# Altium PCB Pedal_Power.PcbDoc
Units mm, origin at the board's own origin, x right, y up, seen from the top; angles counter-clockwise.
Board outline 20 x 54 mm, 2 copper layers (Top Layer, Bottom Layer); 45 components, 30 nets, 115 pads, 44 vias.
Unrouted connection lines stored in the file: 19.
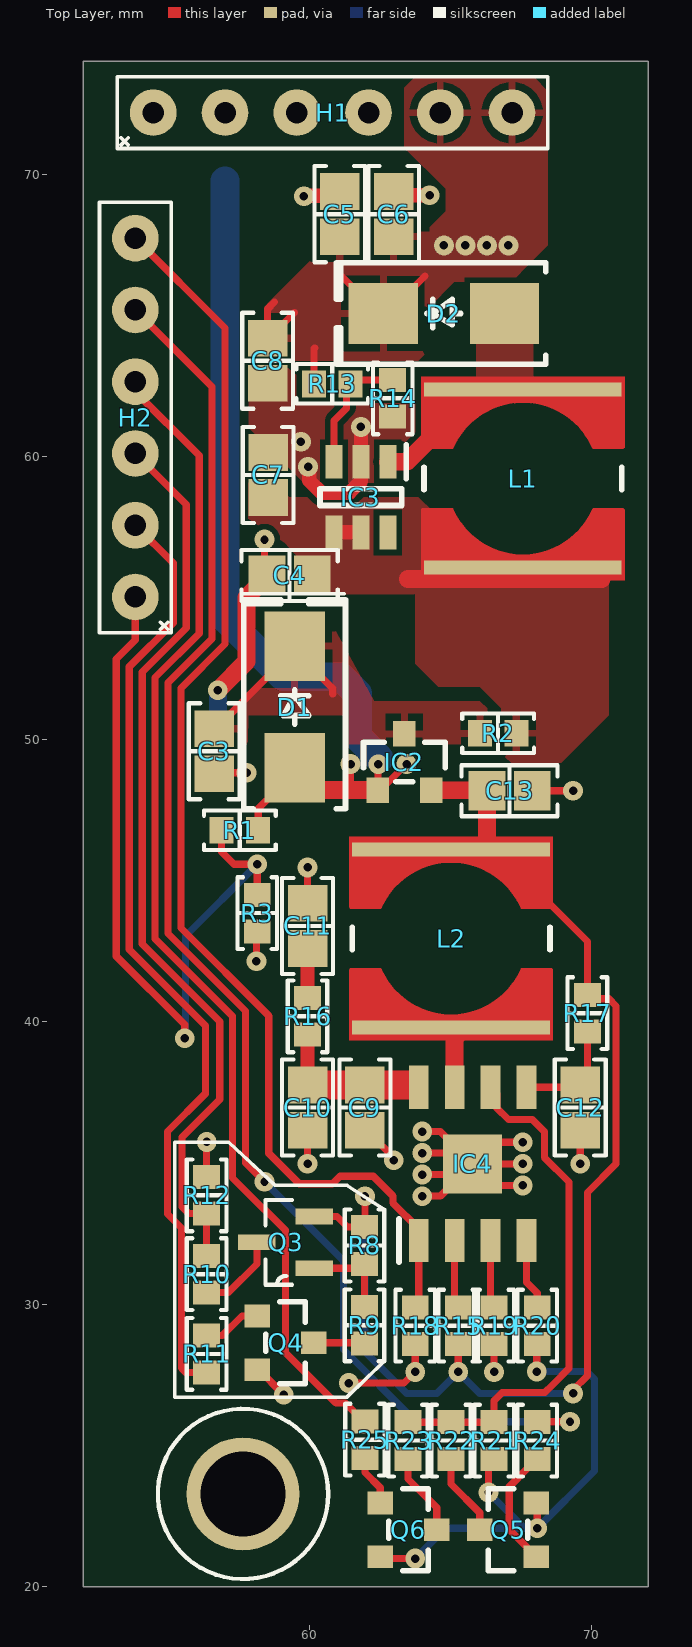
[diagram p0: Top Layer view]
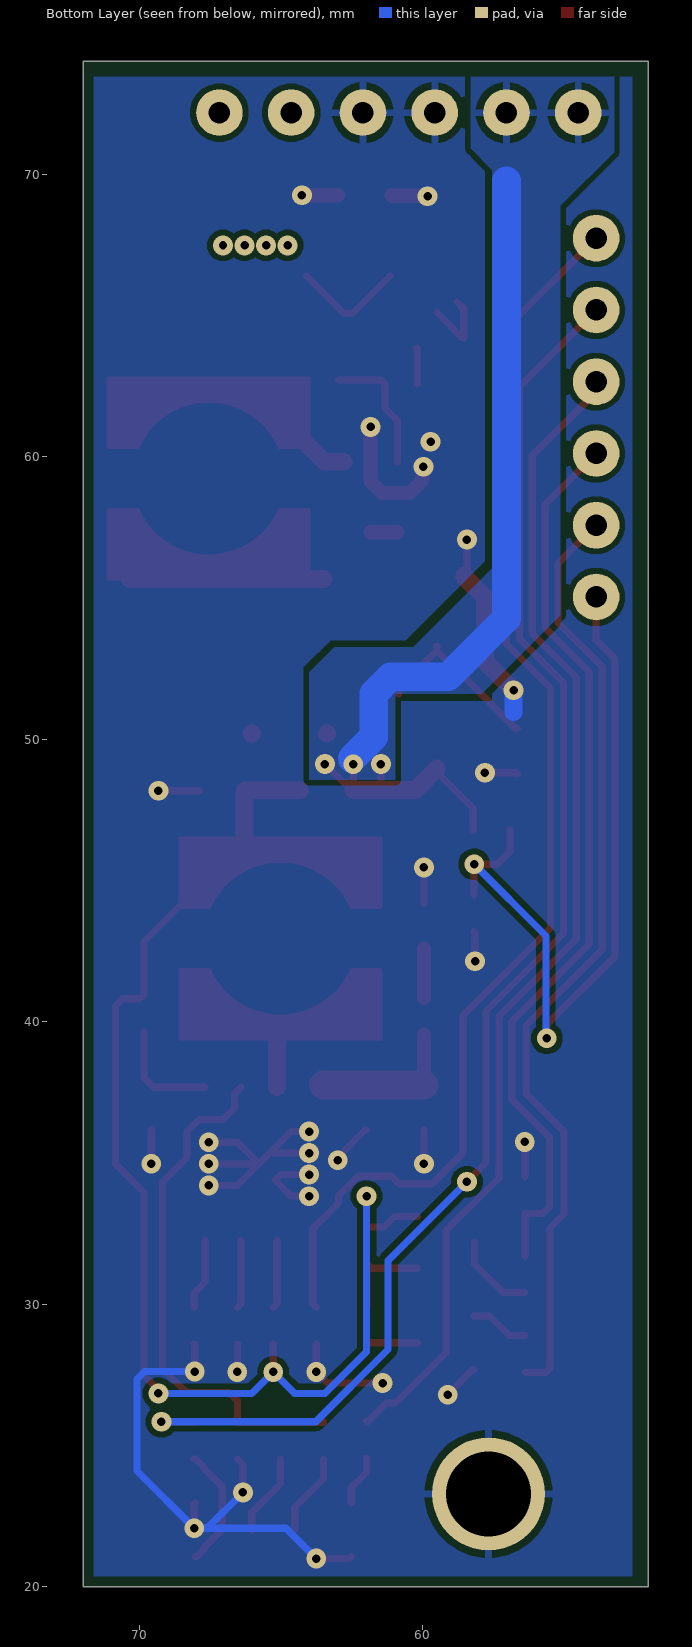
[diagram p1: Bottom Layer view, seen from below]
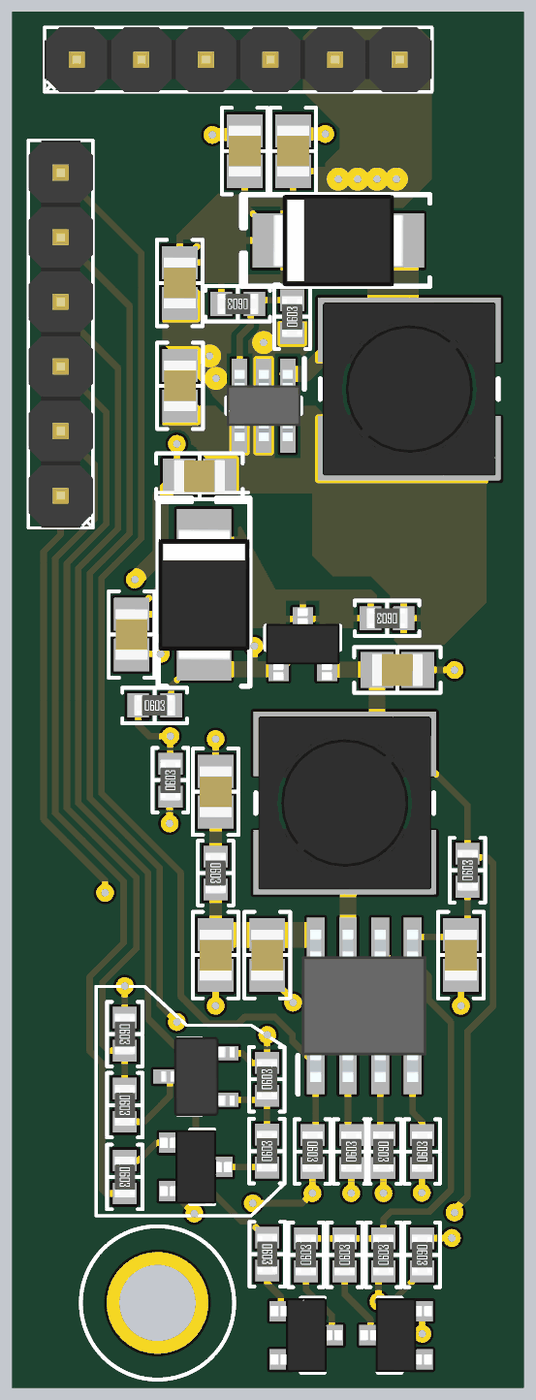
[diagram p2: 3D render of the assembled board from above, using the file's embedded part models]

## Layer stack, top to bottom
Top Solder: solder mask 0.0102, Solder Resist, Dk 3.5
Top Layer: signal copper 0.0356
Dielectric 1: dielectric 0.32, FR-4, Dk 4.8
Bottom Layer: signal copper 0.0356
Bottom Solder: solder mask 0.0102, Solder Resist, Dk 3.5

## Board outline
52,20 72,20 72,74 52,74

## Design rules (kind name [scope] priority, off if disabled: settings)
BoardOutlineClearance [All] p1: gap=0.254 ignorepadtopadclearanceinfootprint=FALSE except(0: Arc-SplitContinuation Track-SplitContinuation SMDPad-SplitContinuation THPad-SplitContinuation Via-SplitContinuation Fill-SplitContinuation Poly-SplitContinuation Region-SplitContinuation Text-SplitContinuation)
Clearance [All] p1: gap=0.203 ignorepadtopadclearanceinfootprint=FALSE
PolygonConnect PolygonConnect_6 [All vs IsNamedPolygon('NONET_L01_P-001')] p1: thpad.connectstyle=Relief thpad.reliefconductorwidth=0.254 thpad.reliefentries=4 thpad.polygonreliefangle="90 Angle" thpad.airgapwidth=0.254 smdpad.connectstyle=Relief smdpad.reliefconductorwidth=0.254 smdpad.reliefentries=4 smdpad.polygonreliefangle="90 Angle" smdpad.airgapwidth=0.254 via.connectstyle=Direct via.reliefconductorwidth=0.254 via.reliefentries=4 via.polygonreliefangle="90 Angle" via.airgapwidth=0.254
PolygonConnect PolygonConnect_5 [All vs IsNamedPolygon('NONET_L01_P-001')] p2: thpad.connectstyle=Relief thpad.reliefconductorwidth=0.254 thpad.reliefentries=4 thpad.polygonreliefangle="90 Angle" thpad.airgapwidth=0.254 smdpad.connectstyle=Relief smdpad.reliefconductorwidth=0.254 smdpad.reliefentries=4 smdpad.polygonreliefangle="90 Angle" smdpad.airgapwidth=0.254 via.connectstyle=Direct via.reliefconductorwidth=0.254 via.reliefentries=4 via.polygonreliefangle="90 Angle" via.airgapwidth=0.254
PolygonConnect PolygonConnect_4 [All vs IsNamedPolygon('NONET_L01_P-001')] p3: thpad.connectstyle=Relief thpad.reliefconductorwidth=0.254 thpad.reliefentries=4 thpad.polygonreliefangle="90 Angle" thpad.airgapwidth=0.254 smdpad.connectstyle=Relief smdpad.reliefconductorwidth=0.254 smdpad.reliefentries=4 smdpad.polygonreliefangle="90 Angle" smdpad.airgapwidth=0.254 via.connectstyle=Direct via.reliefconductorwidth=0.254 via.reliefentries=4 via.polygonreliefangle="90 Angle" via.airgapwidth=0.254
PolygonConnect PolygonConnect_3 [All vs IsNamedPolygon('+5V_L01_P002')] p4: thpad.connectstyle=Relief thpad.reliefconductorwidth=0.254 thpad.reliefentries=4 thpad.polygonreliefangle="90 Angle" thpad.airgapwidth=0.254 smdpad.connectstyle=Relief smdpad.reliefconductorwidth=0.254 smdpad.reliefentries=4 smdpad.polygonreliefangle="90 Angle" smdpad.airgapwidth=0.254 via.connectstyle=Direct via.reliefconductorwidth=0.254 via.reliefentries=4 via.polygonreliefangle="90 Angle" via.airgapwidth=0.254
PolygonConnect PolygonConnect_2 [All vs IsNamedPolygon('NONET_L01_P-001')] p5: thpad.connectstyle=Relief thpad.reliefconductorwidth=0.254 thpad.reliefentries=4 thpad.polygonreliefangle="90 Angle" thpad.airgapwidth=0.254 smdpad.connectstyle=Relief smdpad.reliefconductorwidth=0.254 smdpad.reliefentries=4 smdpad.polygonreliefangle="90 Angle" smdpad.airgapwidth=0.254 via.connectstyle=Direct via.reliefconductorwidth=0.254 via.reliefentries=4 via.polygonreliefangle="90 Angle" via.airgapwidth=0.254
PolygonConnect PolygonConnect_1 [All vs IsNamedPolygon('+5V_L01_P002') Or IsNamedPolygon('+V_SYS_L01_P001') Or IsNamedPolygon('GND_L01_P006') Or IsNamedPolygon('NETD2_1_L01_P003')] p6: thpad.connectstyle=Relief thpad.reliefconductorwidth=0.254 thpad.reliefentries=4 thpad.polygonreliefangle="90 Angle" thpad.airgapwidth=0.254 smdpad.connectstyle=Direct smdpad.reliefconductorwidth=0.254 smdpad.reliefentries=4 smdpad.polygonreliefangle="90 Angle" smdpad.airgapwidth=0.254 via.connectstyle=Direct via.reliefconductorwidth=0.254 via.reliefentries=4 via.polygonreliefangle="90 Angle" via.airgapwidth=0.254
PolygonConnect [All] p7: connectstyle=Relief reliefconductorwidth=0.254 reliefentries=4 polygonreliefangle="90 Angle" airgapwidth=0.254
RoutingVias [All] p1: holewidth=0.3 width=0.7 viastyle="Through Hole" minholewidth=0.3 minwidth=0.7 maxholewidth=0.3 maxwidth=0.7
SolderMaskExpansion [All] p1: expansion=0.102 istentingtop=FALSE
Width [All] p1: maxlimit=1.016 minlimit=0.203 preferedwidth=0.254
30 further rules are at their usual default settings.

## Components (designator, comment, footprint, x,y, rotation, side; value= is the part's Value field where it differs from the comment)
C3 "10 µF" "CAP 0805_2012" 56.638,49.575 r90 top
C4 "1 µF" "CAP 0805_2012" 59.305,55.798 r0 top
C5 "1 µF" "CAP 0805_2012" 61.083,68.587 r270 top
C6 "1 µF" "CAP 0805_2012" 62.988,68.587 r270 top
C7 "22 µF" "CAP 0805_2012" 58.543,59.354 r270 top
C8 "22 µF" "CAP 0805_2012" 58.528,63.398 r90 top
C9 "10 µF" "CAP 0805_2012" 61.972,36.964 r90 top
C10 "22 µF" "CAP 0805_2012" 59.94,36.964 r90 top
C11 "10 µF" "CAP 0805_2012" 59.94,43.39 r270 top
C12 "22 µF" "CAP 0805_2012" 69.592,36.964 r90 top
C13 "22 µF" "CAP 0805_2012" 67.09,48.178 r180 top
D1 "SS24" "DO214AA SMB" 59.486,51.141 r90 top
D2 "SS24" "DO214AA SMB" 64.766,65.069 r180 top
H1 "arduino_header_6" header-6_male 54.479,72.181 r0 top
H2 "arduino_header_6" header-6_male 53.844,55.036 r90 top
IC2 "DMP1045U-7" "DIODES SOT-23-3" 63.369,49.194 r90 top
IC3 "MT3608" SOT95P280X145-6N 61.83,58.572 r270 top
IC4 "IP2312" SOIC127P600X165-9N 65.782,34.97 r90 top
L1 "3.3 µH" "BOURNS SRR6028" 67.56,59.227 r90 top
L2 "3.3 µH" "BOURNS SRR6028" 65.02,42.946 r90 top
Q3 "3906" SOT-23 59.162,32.192 r180 top
Q4 "MMBT3904-7-F" "DIODES SOT-23-3" 59.162,28.636 r0 top
Q5 "MMBT3904-7-F" "DIODES SOT-23-3" 67.036,22.016 r180 top
Q6 "MMBT3904-7-F" "DIODES SOT-23-3" 63.512,22.016 r0 top
R1 "10 kOhms" "RES 0603_1608" 57.542,46.781 r0 top
R2 "=Value" "RES 0603_1608" 66.686,50.21 r180 top
R3 "10 kOhms" "RES 0603_1608" 58.162,43.845 r90 top
R8 "10 kOhms" "RES 0603_1608" 61.956,32.08 r90 top
R9 "10 kOhms" "RES 0603_1608" 61.956,29.256 r90 top
R10 "7.5 kOhms" "RES 0603_1608" 56.368,31.064 r270 top
R11 "10 kOhms" "RES 0603_1608" 56.368,28.24 r270 top
R12 "2.7 kOhms" "RES 0603_1608" 56.368,33.858 r270 top
R13 "10 kOhms" "RES 0603_1608" 60.814,62.58 r180 top
R14 "1 kOhms" "RES 0603_1608" 62.953,62.07 r90 top
R15 "1 kOhms" "RES 0603_1608" 65.274,29.24 r90 top
R16 "2 Ohms" "RES 0603_1608" 59.94,40.192 r270 top
R17 "500 mOhms" "RES 0603_1608" 69.846,40.304 r90 top
R18 "1 kOhms" "RES 0603_1608" 63.75,29.24 r270 top
R19 "1 kOhms" "RES 0603_1608" 66.544,29.24 r270 top
R20 "51 kOhms" "RES 0603_1608" 68.068,29.24 r90 top
R21 "330 kOhms" "RES 0603_1608" 66.544,25.176 r90 top
R22 "220 kOhms" "RES 0603_1608" 65.02,25.176 r90 top
R23 "51 kOhms" "RES 0603_1608" 63.496,25.176 r90 top
R24 "10 kOhms" "RES 0603_1608" 68.068,25.176 r270 top
R25 "10 kOhms" "RES 0603_1608" 61.972,25.206 r270 top

## Footprints (in the part's own frame and the unit in brackets; to place one, negate y for a bottom-side part, rotate by r counter-clockwise, add the part's x,y. Pads: shape width x height; smd on the part's side, far side on the other; paste and mask are expansions set on the pad)
"BOURNS SRR6028" [mm] "Precision Wire Wound Inductor, 2-Leads, Body 6.80x6.80mm, IPC Medium Density"
  rect 0.5x7 smd: 1(-3.15,0) 2(3.15,0)
  Top Layer region: -3.6,3.6 -1.1,3.6 -1.1,2.5 -1.4,2.4 -1.7,2.1 -1.9,2 -2.1,1.7 -2.3,1.4 -2.5,1 -2.6,0.7 -2.7,0.3 -2.7,0 -3.6,0
  Top Layer region: -3.6,-3.6 -1.1,-3.6 -1.1,-2.5 -1.4,-2.4 -1.7,-2.1 -1.9,-2 -2.1,-1.7 -2.3,-1.4 -2.5,-1 -2.6,-0.7 -2.7,-0.3 -2.7,0 -3.6,0
  Top Layer region: 3.6,-3.6 1.1,-3.6 1.1,-2.5 1.4,-2.4 1.7,-2.1 1.9,-2 2.1,-1.7 2.3,-1.4 2.5,-1 2.6,-0.7 2.7,-0.3 2.7,0 3.6,0
  Top Layer region: 3.6,3.6 1.1,3.6 1.1,2.5 1.4,2.4 1.7,2.1 1.9,2 2.1,1.7 2.3,1.4 2.5,1 2.6,0.7 2.7,0.3 2.7,0 3.6,0
  Top Layer lines w0.1: -1.1,3.55 -1.1,2.5 ccw(c0,0) -2.731,0 ccw(c0,0) -1.1,-2.5 -1.1,-3.55 ; 1.1,3.55 1.1,2.5 cw(c0,0) 2.731,0 cw(c0,0) 1.1,-2.5 1.1,-3.55
  silkscreen extent -0.4,-3.5 0.4,3.5, body extent -3.4,-3.4 3.4,3.4, height 2.8
"CAP 0805_2012" [mm] "Chip Capacitor, 2-Leads, Body 2.00x1.20mm, IPC Medium Density"
  rect 1.3x1.4 smd: 1(-0.8,0) 2(0.8,0)
  silkscreen extent -1.7,-0.9 1.7,0.9, body extent -1,-0.64 1,0.64, height 1.26
"DIODES SOT-23-3" [mm] "SOT23, 3-Leads, Body 2.90x2.40mm, Pitch 0.95mm, IPC Medium Density"
  rect 0.9x0.8 smd: 1(-1,0.95) 2(-1,-0.95) 3(1,0)
  silkscreen extent -0.7,-1.45 0.7,1.45, body extent -1.41,-1.45 1.41,1.45, height 1.5
"DO214AA SMB" [mm] "Molded Diode, 2-Leads, Body 4.31x3.62mm, IPC Medium Density"
  rect 2.45x2.15 smd: 1(-2.15,0) 2(2.15,0)
  silkscreen extent -3.6,-1.8 3.8,1.8, body extent -2.6,-1.8 2.6,1.8, height 2.4
header-6_male [mil]
  round 65 hole 30: 1(0,0) 2(100,0) 3(200,0) 4(300,0) 5(400,0) 6(500,0)
  silkscreen extent -50,-50 550,50, body extent -50,-50 550,50, height 339
"RES 0603_1608" [mm] "Chip Resistor, 2-Leads, Body 1.60x0.80mm, IPC Medium Density"
  rect 0.85x0.95 smd: 1(-0.65,0) 2(0.65,0)
  silkscreen extent -1.27,-0.7 1.27,0.7, body extent -0.8,-0.4 0.8,0.4, height 0.45
SOIC127P600X165-9N [mm]
  rect 1.525x0.7 smd: 1(-2.712,1.905) 2(-2.712,0.635) 3(-2.712,-0.635) 4(-2.712,-1.905) 5(2.712,-1.905) 6(2.712,-0.635) 7(2.712,0.635) 8(2.712,1.905)
  rect 2.09x2.09 smd: 9(0,0)
  silkscreen extent -3.47,2.61 -1.95,2.61, body extent -3,-2.45 3,2.45, height 1.65
SOT95P280X145-6N [mm]
  rect 1.2x0.6 smd: 1(-1.25,0.95) 2(-1.25,0) 3(-1.25,-0.95) 4(1.25,-0.95) 5(1.25,0) 6(1.25,0.95)
  silkscreen extent -1.85,-1.45 0.3,1.6, body extent -1.4,-1.45 1.4,1.45, height 1.45
SOT-23 [mil]
  rect 52x22 smd: 1(-40,36) 2(-40,-36) 3(40,0)
  silkscreen extent -9,-59 28,59, body extent -60,-61 58,61, height 57

## Part data
C3 C9 C11: library part C0805C106K8PAC7800, "CAP CER 10UF 10V X5R 0805", Device Package="0805 (2012 Metric)", Manufacturer=KEMET, Operating Temperature="-55°C ~ 85°C", Supplier Part Number 1=399-C0805C106K8PAC7800CT-ND, Temperature Coefficient=X5R, Tolerance=±10%, Voltage - Rated=10V, Applications="Bypass, Decoupling", Capacitance="10 µF", ComponentLink1Description=Datasheet, ComponentLink1URL=https://connect.kemet.com:7667/gateway/IntelliData-ComponentDocumentation/1.0/download/datasheet/C0805C106K8PACTU, ComponentLink2Description="DigiKey Link", ComponentLink2URL=https://www.digikey.com/en/products/detail/kemet/C0805C106K8PAC7800/1090830, LastUpdated="9/14/2022 7:51:56 AM", Lifecycle Status=Active, Minimum Order=1, Mounting Type="Surface Mount, MLCC", Package / Case="0805 (2012 Metric)", Packaging=TapeAndReel, Part Number=C0805C106K8PAC7800, Part Status=Active, PartId=44790, Price=0.02, Series="SMD Comm X5R", Size / Dimension="0.079\" L x 0.049\" W (2.00mm x 1.25mm)", Supplier 1=DigiKey, Thickness (Max)="0.055\" (1.40mm)"
C4 C5 C6: library part C0805C105K4RAC7800, "CAP CER 1UF 16V X7R 0805", Device Package="0805 (2012 Metric)", Manufacturer=KEMET, Operating Temperature="-55°C ~ 125°C", Supplier Part Number 1=399-C0805C105K4RAC7800CT-ND, Temperature Coefficient=X7R, Tolerance=±10%, Voltage - Rated=16V, Applications="Bypass, Decoupling", Capacitance="1 µF", ComponentLink1Description=Datasheet, ComponentLink1URL=https://api.kemet.com/component-edge/download/datasheet/C0805C105K4RACTU.pdf, ComponentLink2Description="DigiKey Link", ComponentLink2URL=https://www.digikey.com/en/products/detail/kemet/C0805C105K4RAC7800/416047, LastUpdated="9/19/2022 1:03:30 PM", Lifecycle Status=Active, Minimum Order=1, Mounting Type="Surface Mount, MLCC", Package / Case="0805 (2012 Metric)", Packaging=TapeAndReel, Part Number=C0805C105K4RAC7800, Part Status=Active, PartId=32075, Price=0.01, Series="SMD Comm X7R", Size / Dimension="0.079\" L x 0.049\" W (2.00mm x 1.25mm)", Supplier 1=DigiKey, Thickness (Max)="0.039\" (1.00mm)"
C7 C8 C10 C12 C13: library part GRM21BR61E226ME44K, "CAP CER 22UF 25V X5R 0805", Device Package="0805 (2012 Metric)", Manufacturer="Murata Electronics", Operating Temperature="-55°C ~ 85°C", Supplier Part Number 1=490-14661-1-ND, Temperature Coefficient=X5R, Tolerance=±20%, Voltage - Rated=25V, Applications="General Purpose", Capacitance="22 µF", ComponentLink1Description=Datasheet, ComponentLink1URL=https://search.murata.co.jp/Ceramy/image/img/A01X/G101/ENG/GRM21BR61E226ME44-01.pdf, ComponentLink2Description="DigiKey Link", ComponentLink2URL=https://www.digikey.com/en/products/detail/murata-electronics/GRM21BR61E226ME44K/4905534, LastUpdated="2/9/2024 8:15:53 PM", Lifecycle Status=Active, Minimum Order=1, Mounting Type="Surface Mount, MLCC", Package / Case="0805 (2012 Metric)", Packaging=TapeAndReel, Part Number=GRM21BR61E226ME44K, Part Status=Active, PartId=39870, Price=0.05, Series=GRM, Size / Dimension="0.079\" L x 0.049\" W (2.00mm x 1.25mm)", Supplier 1=DigiKey, Thickness (Max)="0.057\" (1.45mm)"
D1 D2: "DIODE SCHOTTKY 40V 2A DO214AA", Current - Average Rectified (Io)=2A, Current - Reverse Leakage @ Vr="400µA @ 40V", Manufacturer="ON Semiconductor", Operating Temperature - Junction="-65°C ~ 125°C", Package / Case="DO-214AA, SMB", Supplier Device Package="DO-214AA (SMB)", Supplier Part Number 1=SS24FSCT-ND, Voltage - DC Reverse (Vr) (Max)=40V, Voltage - Forward (Vf) (Max) @ If="500mV @ 2A", ComponentLink1Description=Datasheet, ComponentLink1URL=https://www.onsemi.com/pub/Collateral/SS29-D.pdf, ComponentLink2Description="DigiKey Link", ComponentLink2URL=http://digikey.com/product-detail/en/on-semiconductor/SS24/SS24FSCT-ND/1626273, Diode Type=Schottky, LastUpdated="2/8/2024 9:26:46 PM", Lifecycle Status=Active, Minimum Order=1, Mounting Type="Surface Mount", Packaging=TapeAndReel, Part Number=SS24, Part Status=Active, PartId=1394, Price=0.10, Series=-, Speed="Fast Recovery =< 500ns, > 200mA (Io)", Supplier 1=DigiKey
IC2: "MOSFET P-CH 12V 4A SOT23", Current - Continuous Drain (Id) @ 25°C="4A (Ta)", Drain to Source Voltage (Vdss)="12 V", Drive Voltage (Max Rds On,  Min Rds On)="1.8V, 4.5V", Input Capacitance (Ciss) (Max) @ Vds="1357 pF @ 10 V", Manufacturer="Diodes Incorporated", Operating Temperature="-55°C ~ 150°C (TJ)", Package / Case="TO-236-3, SC-59, SOT-23-3", Power Dissipation (Max)="800mW (Ta)", Supplier Device Package=SOT-23-3, Supplier Part Number 1=DMP1045U-7DICT-ND, ComponentLink1Description=Datasheet, ComponentLink1URL=https://www.diodes.com/assets/Datasheets/DMP1045U.pdf, ComponentLink2Description="DigiKey Link", ComponentLink2URL=https://www.digikey.com/en/products/detail/diodes-incorporated/DMP1045U-7/4249936, FET Type=P-Channel, Gate Charge (Qg) (Max) @ Vgs="15.8 nC @ 4.5 V", LastUpdated="2/8/2024 9:46:13 PM", Lifecycle Status=Active, Minimum Order=1, Mounting Type="Surface Mount", Packaging=TapeAndReel, Part Number=DMP1045U-7, Part Status=Active, Price=0.07, Rds On (Max) @ Id, Vgs="31mOhm @ 4A, 4.5V", Series=-, Supplier 1=DigiKey, Technology="MOSFET (Metal Oxide)", Vgs (Max)=±8V, Vgs(th) (Max) @ Id="1V @ 250µA"
IC3: "Integrated Circuit", Manufacturer_Name=Aerosemi, Datasheet Link=https://www.olimex.com/Products/Breadboarding/BB-PWR-3608/resources/MT3608.pdf, Height=1.45mm, Manufacturer_Part_Number=MT3608
IC4: "Integrated Circuit", Manufacturer_Name=INJOINIC, Datasheet Link=http://www.injoinic.com/wwwroot/uploads/files/20230913/623558e526750db62e25e32800f94a6b.pdf, Height=1.65mm, Manufacturer_Part_Number=IP2312
L1 L2: library part SRR6028-3R3Y, "FIXED IND 3.3UH 2.5A 28 MOHM SMD", Current - Saturation=2.6A, Current Rating (Amps)="2.5 A", DC Resistance (DCR)="28mOhm Max", Device Package=Nonstandard, Frequency - Self Resonant=45MHz, Inductance Frequency - Test="100 kHz", Manufacturer="Bourns Inc.", Operating Temperature="-40°C ~ 125°C", Q @ Freq="10 @ 7.96MHz", Supplier Part Number 1=118-SRR6028-3R3YCT-ND, Tolerance=±30%, ComponentLink1Description=Datasheet, ComponentLink1URL=https://www.bourns.com/docs/Product-Datasheets/SRR6028.pdf, ComponentLink2Description="DigiKey Link", ComponentLink2URL=https://www.digikey.com/en/products/detail/bourns-inc/SRR6028-3R3Y/1970369, Height - Seated (Max)="0.118\" (3.00mm)", Inductance="3.3 µH", LastUpdated="2/8/2024 9:34:55 PM", Lifecycle Status=Active, Material - Core=Ferrite, Minimum Order=1, Mounting Type="Surface Mount", Package / Case=Nonstandard, Packaging=TapeAndReel, Part Number=SRR6028-3R3Y, Part Status=Active, PartId=57, Price=0.31, Series=SRR6028, Shielding=Shielded, Size / Dimension="0.268\" L x 0.268\" W (6.80mm x 6.80mm)", Supplier 1=DigiKey, Type="Drum Core, Wirewound"
Q3: library part MMBT3906
Q4 Q5 Q6: "TRANS NPN 40V 0.2A SOT23-3", Current - Collector (Ic) (Max)="200 mA", Current - Collector Cutoff (Max)="50nA (ICBO)", DC Current Gain (hFE) (Min) @ Ic, Vce="100 @ 10mA, 1V", Frequency - Transition=300MHz, Manufacturer="Diodes Incorporated", Operating Temperature="-55°C ~ 150°C (TJ)", Package / Case="TO-236-3, SC-59, SOT-23-3", Power - Max="300 mW", Supplier Device Package=SOT-23-3, Supplier Part Number 1=MMBT3904-FDICT-ND, Voltage - Collector Emitter Breakdown (Max)="40 V", ComponentLink1Description=Datasheet, ComponentLink1URL=https://www.diodes.com/assets/Datasheets/ds30036.pdf, ComponentLink2Description="DigiKey Link", ComponentLink2URL=https://www.digikey.com/en/products/detail/diodes-incorporated/MMBT3904-7-F/814494, LastUpdated="2/8/2024 9:54:04 PM", Lifecycle Status=Active, Minimum Order=1, Mounting Type="Surface Mount", Packaging=TapeAndReel, Part Number=MMBT3904-7-F, Part Status=Active, PartId=85, Price=0.01, Series=-, Supplier 1=DigiKey, Transistor Type=NPN, Vce Saturation (Max) @ Ib, Ic="300mV @ 5mA, 50mA"
R1 R3 R8 R9 R11 R13 R24 R25: library part RT0603FRE0710KL, "RES SMD 10K OHM 1% 1/10W 0603", Device Package="0603 (1608 Metric)", Manufacturer=Yageo, Operating Temperature="-55°C ~ 155°C", Power (Watts)="0.1W, 1/10W", Supplier Device Package=0603, Supplier Part Number 1=YAG2321CT-ND, Temperature Coefficient=±50ppm/°C, Tolerance=±1%, ComponentLink1Description=Datasheet, ComponentLink1URL=https://www.yageo.com/upload/media/product/productsearch/datasheet/rchip/PYu-RT_1-to-0.01_RoHS_L_11.pdf, ComponentLink2Description="DigiKey Link", ComponentLink2URL=http://digikey.com/product-detail/en/yageo/RT0603FRE0710KL/YAG2321CT-ND/5252435, Composition="Thin Film", Height - Seated (Max)="0.022\" (0.55mm)", LastUpdated="9/2/2020 1:10:23 AM", Lifecycle Status=Active, Minimum Order=1, Number of Terminations=2, Package / Case="0603 (1608 Metric)", Packaging=TapeAndReel, Part Number=RT0603FRE0710KL, Part Status=Active, PartId=5671, Price=0.01, Resistance="10 kOhms", Series=RT, Size / Dimension="0.063\" L x 0.031\" W (1.60mm x 0.80mm)", Supplier 1=DigiKey
R2: library part RCA06030000ZSEA, "RES SMD 0 OHM JUMPER 1/10W 0603", Device Package="0603 (1608 Metric)", Manufacturer="Vishay Dale", Operating Temperature="-55°C ~ 155°C", Power (Watts)="0.1W, 1/10W", Ratings=AEC-Q200, Supplier Device Package=0603, Supplier Part Number 1=541-2192-1-ND, Tolerance=Jumper, ComponentLink1Description=Datasheet, ComponentLink1URL=http://www.vishay.com/docs/20037/rcae3.pdf, ComponentLink2Description="DigiKey Link", ComponentLink2URL=http://digikey.com/product-detail/en/vishay-dale/RCA06030000ZSEA/541-2192-1-ND/4946845, Composition="Thick Film", Features="Anti-Sulfur, Automotive AEC-Q200", Height - Seated (Max)="0.020\" (0.50mm)", LastUpdated="9/2/2020 1:10:23 AM", Lifecycle Status=Active, Minimum Order=1, Number of Terminations=2, Package / Case="0603 (1608 Metric)", Packaging=TapeAndReel, Part Number=RCA06030000ZSEA, Part Status=Active, PartId=5740, Price=0.01, Series=RCA, Size / Dimension="0.061\" L x 0.033\" W (1.55mm x 0.85mm)", Supplier 1=DigiKey
R10: library part RC0603FR-077K5L, "RES 7.5K OHM 1% 1/10W 0603", Device Package="0603 (1608 Metric)", Manufacturer=Yageo, Operating Temperature="-55°C ~ 155°C", Power (Watts)="0.1W, 1/10W", Supplier Device Package=0603, Supplier Part Number 1=311-7.50KHRCT-ND, Temperature Coefficient=±100ppm/°C, Tolerance=±1%, ComponentLink1Description=Datasheet, ComponentLink1URL=https://www.yageo.com/upload/media/product/productsearch/datasheet/rchip/PYu-RC_Group_51_RoHS_L_10.pdf, ComponentLink2Description="DigiKey Link", ComponentLink2URL=https://www.digikey.com/en/products/detail/yageo/RC0603FR-077K5L/727366, Composition="Thick Film", Features="Moisture Resistant", Height - Seated (Max)="0.022\" (0.55mm)", LastUpdated="2/9/2024 8:42:41 PM", Lifecycle Status=Active, Minimum Order=1, Number of Terminations=2, Package / Case="0603 (1608 Metric)", Packaging=CutTape, Part Number=RC0603FR-077K5L, Part Status=Active, PartId=19041, Price=0.01, Resistance="7.5 kOhms", Series=RC_L, Size / Dimension="0.063\" L x 0.031\" W (1.60mm x 0.80mm)", Supplier 1=DigiKey
R12: library part RC0603FR-072K7L, "RES 2.7K OHM 1% 1/10W 0603", Device Package="0603 (1608 Metric)", Manufacturer=Yageo, Operating Temperature="-55°C ~ 155°C", Power (Watts)="0.1W, 1/10W", Supplier Device Package=0603, Supplier Part Number 1=311-2.70KHRCT-ND, Temperature Coefficient=±100ppm/°C, Tolerance=±1%, ComponentLink1Description=Datasheet, ComponentLink1URL=https://www.yageo.com/upload/media/product/productsearch/datasheet/rchip/PYu-RC_Group_51_RoHS_L_10.pdf, ComponentLink2Description="DigiKey Link", ComponentLink2URL=https://www.digikey.com/en/products/detail/yageo/RC0603FR-072K7L/727032, Composition="Thick Film", Features="Moisture Resistant", Height - Seated (Max)="0.022\" (0.55mm)", LastUpdated="2/9/2024 8:42:41 PM", Lifecycle Status=Active, Minimum Order=1, Number of Terminations=2, Package / Case="0603 (1608 Metric)", Packaging=CutTape, Part Number=RC0603FR-072K7L, Part Status=Active, PartId=19013, Price=0.01, Resistance="2.7 kOhms", Series=RC_L, Size / Dimension="0.063\" L x 0.031\" W (1.60mm x 0.80mm)", Supplier 1=DigiKey
R14: library part RT0603FRE071KL, "RES SMD 1K OHM 1% 1/10W 0603", Device Package="0603 (1608 Metric)", Manufacturer=Yageo, Operating Temperature="-55°C ~ 155°C", Power (Watts)="0.1W, 1/10W", Supplier Device Package=0603, Supplier Part Number 1=YAG2323CT-ND, Temperature Coefficient=±50ppm/°C, Tolerance=±1%, ComponentLink1Description=Datasheet, ComponentLink1URL=https://www.yageo.com/upload/media/product/productsearch/datasheet/rchip/PYu-RT_1-to-0.01_RoHS_L_11.pdf, ComponentLink2Description="DigiKey Link", ComponentLink2URL=https://www.digikey.com/en/products/detail/yageo/RT0603FRE071KL/1075188, Composition="Thin Film", Height - Seated (Max)="0.022\" (0.55mm)", LastUpdated="9/19/2022 1:22:31 PM", Lifecycle Status=Active, Minimum Order=1, Number of Terminations=2, Package / Case="0603 (1608 Metric)", Packaging=TapeAndReel, Part Number=RT0603FRE071KL, Part Status=Active, PartId=5672, Price=0.01, Resistance="1 kOhms", Series=RT, Size / Dimension="0.063\" L x 0.031\" W (1.60mm x 0.80mm)", Supplier 1=DigiKey
R15 R18 R19: library part RC0603JR-071KP, "RES 1K OHM 5% 1/10W 0603", Device Package="0603 (1608 Metric)", Manufacturer=Yageo, Operating Temperature="-55°C ~ 155°C", Power (Watts)="0.1W, 1/10W", Ratings="7C1 RoHS w/out Exemption (100% Pb-Free)", Supplier Device Package=0603, Supplier Part Number 1=YAG1311CT-ND, Temperature Coefficient=±100ppm/°C, Tolerance=±5%, ComponentLink1Description=Datasheet, ComponentLink1URL=http://www.yageo.com/NewPortal/yageodocoutput?fileName=/pdf/R-Chip/PYu-RC_51_RoHS_P_0.pdf, ComponentLink2Description="DigiKey Link", ComponentLink2URL=https://www.digikey.com/en/products/detail/yageo/RC0603JR-071KP/4935326, Composition="Thick Film", Features="Moisture Resistant", Height - Seated (Max)="0.022\" (0.55mm)", LastUpdated="2/9/2024 8:43:09 PM", Lifecycle Status=Active, Minimum Order=1, Number of Terminations=2, Package / Case="0603 (1608 Metric)", Packaging=TapeAndReel, Part Number=RC0603JR-071KP, Part Status=Active, PartId=11731, Price=0.01, Resistance="1 kOhms", Series=RC_P, Size / Dimension="0.063\" L x 0.031\" W (1.60mm x 0.80mm)", Supplier 1=DigiKey
R16: library part RC0603FR-072RL, "RES 2 OHM 1% 1/10W 0603", Device Package="0603 (1608 Metric)", Manufacturer=Yageo, Operating Temperature="-55°C ~ 155°C", Power (Watts)="0.1W, 1/10W", Supplier Device Package=0603, Supplier Part Number 1=311-2.00HRCT-ND, Temperature Coefficient=±200ppm/°C, Tolerance=±1%, ComponentLink1Description=Datasheet, ComponentLink1URL=https://www.yageo.com/upload/media/product/productsearch/datasheet/rchip/PYu-RC_Group_51_RoHS_L_10.pdf, ComponentLink2Description="DigiKey Link", ComponentLink2URL=https://www.digikey.com/en/products/detail/yageo/RC0603FR-072RL/727008, Composition="Thick Film", Features="Moisture Resistant", Height - Seated (Max)="0.022\" (0.55mm)", LastUpdated="2/9/2024 8:43:04 PM", Lifecycle Status=Active, Minimum Order=1, Number of Terminations=2, Package / Case="0603 (1608 Metric)", Packaging=TapeAndReel, Part Number=RC0603FR-072RL, Part Status=Active, PartId=12910, Price=0.01, Resistance="2 Ohms", Series=RC_L, Size / Dimension="0.063\" L x 0.031\" W (1.60mm x 0.80mm)", Supplier 1=DigiKey
R17: library part RL0603FR-070R5L, "RES 0.5 OHM 1% 1/10W 0603", Device Package="0603 (1608 Metric)", Manufacturer=Yageo, Operating Temperature="-55°C ~ 155°C", Power (Watts)="0.1W, 1/10W", Ratings=AEC-Q200, Supplier Device Package=0603, Supplier Part Number 1=311-.5QCT-ND, Temperature Coefficient=±800ppm/°C, Tolerance=±1%, ComponentLink1Description=Datasheet, ComponentLink1URL=http://www.yageo.com/documents/recent/PYu-RL_Group_521_RoHS_L_2.pdf, ComponentLink2Description="DigiKey Link", ComponentLink2URL=https://www.digikey.com/en/products/detail/yageo/RL0603FR-070R5L/3885517, Composition="Thick Film", Features="Automotive AEC-Q200, Current Sense, Moisture Resistant", Height - Seated (Max)="0.022\" (0.55mm)", LastUpdated="2/9/2024 8:43:08 PM", Lifecycle Status=Active, Minimum Order=1, Number of Terminations=2, Package / Case="0603 (1608 Metric)", Packaging=TapeAndReel, Part Number=RL0603FR-070R5L, Part Status=Active, PartId=12049, Price=0.03, Resistance="500 mOhms", Series=RL, Size / Dimension="0.063\" L x 0.031\" W (1.60mm x 0.80mm)", Supplier 1=DigiKey
R20 R23: library part RC0603FR-0751KL, "RES 51K OHM 1% 1/10W 0603", Device Package="0603 (1608 Metric)", Manufacturer=Yageo, Operating Temperature="-55°C ~ 155°C", Power (Watts)="0.1W, 1/10W", Supplier Device Package=0603, Supplier Part Number 1=311-51.0KHRCT-ND, Temperature Coefficient=±100ppm/°C, Tolerance=±1%, ComponentLink1Description=Datasheet, ComponentLink1URL=https://www.yageo.com/upload/media/product/productsearch/datasheet/rchip/PYu-RC_Group_51_RoHS_L_10.pdf, ComponentLink2Description="DigiKey Link", ComponentLink2URL=https://www.digikey.com/en/products/detail/yageo/RC0603FR-0751KL/727282, Composition="Thick Film", Features="Moisture Resistant", Height - Seated (Max)="0.022\" (0.55mm)", LastUpdated="2/9/2024 8:42:42 PM", Lifecycle Status=Active, Minimum Order=1, Number of Terminations=2, Package / Case="0603 (1608 Metric)", Packaging=CutTape, Part Number=RC0603FR-0751KL, Part Status=Active, PartId=18942, Price=0.01, Resistance="51 kOhms", Series=RC_L, Size / Dimension="0.063\" L x 0.031\" W (1.60mm x 0.80mm)", Supplier 1=DigiKey
R21: library part RC0603JR-07330KL, "RES 330K OHM 5% 1/10W 0603", Device Package="0603 (1608 Metric)", Manufacturer=Yageo, Operating Temperature="-55°C ~ 155°C", Power (Watts)="0.1W, 1/10W", Supplier Device Package=0603, Supplier Part Number 1=311-330KGRCT-ND, Temperature Coefficient=±100ppm/°C, Tolerance=±5%, ComponentLink1Description=Datasheet, ComponentLink1URL=https://www.yageo.com/upload/media/product/productsearch/datasheet/rchip/PYu-RC_Group_51_RoHS_L_10.pdf, ComponentLink2Description="DigiKey Link", ComponentLink2URL=https://www.digikey.com/en/products/detail/yageo/RC0603JR-07330KL/726770, Composition="Thick Film", Features="Moisture Resistant", Height - Seated (Max)="0.022\" (0.55mm)", LastUpdated="2/9/2024 8:42:48 PM", Lifecycle Status=Active, Minimum Order=1, Number of Terminations=2, Package / Case="0603 (1608 Metric)", Packaging=CutTape, Part Number=RC0603JR-07330KL, Part Status=Active, PartId=17213, Price=0.01, Resistance="330 kOhms", Series=RC_L, Size / Dimension="0.063\" L x 0.031\" W (1.60mm x 0.80mm)", Supplier 1=DigiKey
R22: library part RC0603FR-07220KL, "RES 220K OHM 1% 1/10W 0603", Device Package="0603 (1608 Metric)", Manufacturer=Yageo, Operating Temperature="-55°C ~ 155°C", Power (Watts)="0.1W, 1/10W", Supplier Device Package=0603, Supplier Part Number 1=311-220KHRCT-ND, Temperature Coefficient=±100ppm/°C, Tolerance=±1%, ComponentLink1Description=Datasheet, ComponentLink1URL=https://www.yageo.com/upload/media/product/productsearch/datasheet/rchip/PYu-RC_Group_51_RoHS_L_10.pdf, ComponentLink2Description="DigiKey Link", ComponentLink2URL=https://www.digikey.com/en/products/detail/yageo/RC0603FR-07220KL/727062, Composition="Thick Film", Features="Moisture Resistant", Height - Seated (Max)="0.022\" (0.55mm)", LastUpdated="2/9/2024 8:42:41 PM", Lifecycle Status=Active, Minimum Order=1, Number of Terminations=2, Package / Case="0603 (1608 Metric)", Packaging=CutTape, Part Number=RC0603FR-07220KL, Part Status=Active, PartId=19015, Price=0.01, Resistance="220 kOhms", Series=RC_L, Size / Dimension="0.063\" L x 0.031\" W (1.60mm x 0.80mm)", Supplier 1=DigiKey

## Free pads (board coordinates)
  round 4 hole 3: qq(57.654,23.286)

## Via types
v1: diameter 0.7, hole 0.3, Top Layer to Bottom Layer, 44 vias

## Nets (pads, with @x,y where several pads share a name; then routed paths per layer and width w, separated by ;. In a path a pad name is that pad's centre, name@x,y a point inside that pad or via, vN(x,y) a via of type N, cw(c..) or ccw(c..) an arc to the next point about the centre after c; other vN are vias at no path point)
+5V: C5.2 C6.2 C8.2 D2.2 H1.5 H1.6 R13.2 | length 8
  Top Layer w0.254: 58.769,65.476 58.528,65.236 C8.2 58.578,64.198 59.482,65.102 ; R13.2 60.164,63.82 60.194,63.85 ; 61.137,66.398 62.466,65.069 D2.2 62.766,65.069 64.095,66.398
  other v1: 64.766,67.482 65.528,67.482 66.29,67.482 67.052,67.482
+V_SYS: C4.2 C7.2 IC3.4 IC3.5 L1.1 R2.1 | length 9
  Top Layer w0.508: IC3.4 IC3.5
  Top Layer w0.635: 63.496,55.671 70.354,55.671 ; L1.1@67.941,56.204 68.89,56.204 L1.1@69.084,56.01
ADC_ON: H2.3 R10.1 R12.2 | length 32.2
  Top Layer w0.254: H2.3 55.648,58.313 55.648,53.937 54.086,52.376 54.086,42.75 56.831,40.005 56.831,37.244 55.495,35.909 55.495,33.446 55.733,33.208 R12.2 R10.1
ADC_VBAT: H2.2 R11.2 | length 33.9
  Top Layer w0.254: H2.2 55.19,56.23 55.19,54.127 53.629,52.565 53.629,42.56 56.323,39.867 56.323,37.455 54.987,36.119 54.987,33.192 55.478,32.701 55.478,27.739 55.627,27.59 R11.2
ADC_VUSB: H2.1 R1.1 R3.2 | length 27.4
  Top Layer w0.254: H2.1 53.844,53.512 53.172,52.84 53.172,42.319 55.592,39.899 v1(55.592,39.415) ; R1.1 56.892,46.019 57.337,45.575 v1(58.162,45.575) R3.2
  Bottom Layer w0.254: v1(55.592,39.415) 55.622,39.446 55.622,43.035 v1(58.162,45.575)
CHARGE_STATUS: H2.6 IC4.1 R18.1 | length 45.3
  Top Layer w0.254: H2.6 57.019,64.561 57.019,53.369 55.458,51.808 55.458,43.318 58.566,40.209 58.566,35.346 59.648,34.264 60.822,34.264 61.09,34.533 62.265,34.533 62.959,33.838 62.959,33.588 63.877,32.671 IC4.1 63.877,30.017 R18.1
CHRATE_1: H2.5 R24.1 | length 51.4
  Top Layer w0.254: H2.5 56.562,62.478 56.562,53.559 55.001,51.997 55.001,43.128 57.745,40.384 57.745,35.006 v1(58.416,34.335) ; R24.1 68.082,25.84 v1(69.231,25.84)
  Bottom Layer w0.254: v1(58.416,34.335) 61.21,31.541 61.21,28.399 63.769,25.84 v1(69.231,25.84)
CHRATE_2: H2.4 R25.1 | length 41.7
  Top Layer w0.254: H2.4 53.844,62.3 56.105,60.039 56.105,53.748 54.543,52.186 54.543,42.939 57.288,40.195 57.288,34.466 58.394,33.359 58.422,33.359 59.162,32.619 59.162,31.704 59.162,28.283 60.942,26.503 61.275,26.503 61.922,25.856 R25.1
GND: C3.1 C4.1 C5.1 C6.1 C7.1 C8.1 C9.1 C10.1 C11.1 C12.1 C13.1 H1.3 H1.4 IC3.2 IC4.9 pad.qq Q4.2 Q5.2 Q6.2 R3.1 R12.1 R14.1 R18.2 R19.2 R20.1 R21.1 | length 62
  Top Layer w0.254: R12.1 v1(56.368,35.748) ; C3.1@56.629,48.766 C3.1 56.676,48.813 v1(57.781,48.813) ; v1(58.13,42.141) 58.13,43.163 R3.1 ; Q4.2 58.212,27.686 59.098,26.8 v1(59.1,26.8) ; v1(58.416,57.068) 58.416,55.887 C4.1 ; v1(59.94,34.97) C10.1 ; C11.1 v1(59.94,45.463) ; v1(61.402,27.209) 63.355,27.209 v1(63.75,27.604) R18.2 ; C9.1 62.022,36.164 62.988,35.198 v1(62.988,35.097) ; Q6.2 62.578,21 v1(63.75,21) ; v1(64.004,33.827) 64.639,33.827 65.211,34.399 65.02,34.589 v1(64.004,34.589) ; v1(64.004,35.351) IC4.9@65.401,35.351 ; v1(64.004,36.113) 64.639,36.113 IC4.9@65.401,35.351 ; v1(66.346,23.342) 66.346,24.328 R21.1 ; v1(66.544,27.604) R19.2 ; v1(67.56,34.208) 66.544,34.208 IC4.9 ; v1(67.56,34.97) IC4.9 ; v1(67.56,35.732) 66.544,35.732 IC4.9 ; C13.1 v1(69.338,48.178) ; Q5.2 68.068,22.934 v1(68.068,22.07) ; v1(68.051,27.619) 68.051,28.573 R20.1 ; v1(69.592,34.97) C12.1 ; IC4.9@65.401,35.351 IC4.9
  Top Layer w0.508: v1(59.813,69.222) 59.832,69.241 61.064,69.241 C5.1@61.083,69.26 ; v1(59.958,59.645) 59.994,59.609 59.994,59.161 60.442,58.714 61.411,58.714 61.83,59.133 IC3.2 v1(61.83,61.056) ; C6.1@62.988,69.26 v1(64.258,69.26)
  Top Layer w0.635: v1(56.765,51.734) 57.781,52.75 57.781,55.024 58.505,55.748 C4.1
  Bottom Layer w0.254: v1(63.75,21) 64.82,22.07 v1(68.068,22.07) ; v1(66.346,23.342) 67.591,22.096 68.042,22.096 v1(68.068,22.07) ; v1(68.051,27.619) 69.831,27.619 70.1,27.35 70.1,24.102 v1(68.068,22.07)
  Bottom Layer w0.635: 56.765,50.972 v1(56.765,51.734)
  other v1: 59.705,60.527
NetC3_2: C3.2 D1.2 IC2.3 R2.2 | length 6.3
  Top Layer w0.254: C3.2 56.688,50.375 58.506,52.193 58.538,52.193 D1.2@59.486,53.141 ; D1.2 D1.2@59.486,53.141 ; 60.829,51.607 60.829,51.797 D1.2@59.486,53.141
  Top Layer w0.635: IC2.3 IC2.3@63.377,50.202 ; R2.2@66.028,50.202 R2.2
NetC9_2: C9.2 C10.2 IC4.8 R16.2 | length 5.3
  Top Layer w0.508: C10.2 R16.2
  Top Layer w1.016: C10.2 C9.2 63.496,37.764
NetC11_2: C11.2 R16.1 | length 1.7
  Top Layer w0.508: R16.1 C11.2
NetC12_2: C12.2 IC4.5 R17.1 | length 3.9
  Top Layer w0.254: IC4.5 69.51,37.682 C12.2 69.846,38.018 R17.1
NetD2_1: D2.1 IC3.1 L1.2 | length 6.4
  Top Layer w0.635: IC3.1 63.456,59.822 64.659,61.025 ; 64.512,61.025 64.659,61.025 ; L1.2@67.941,62.504 66.138,62.504 64.659,61.025
NetIC3_3: IC3.3 R13.1 R14.2 | length 4.6
  Top Layer w0.254: IC3.3 60.88,61.276 61.322,61.718 61.322,62.58 61.463,62.72 R14.2
NetIC4_2: IC4.2 R15.2 | length 2.4
  Top Layer w0.254: IC4.2 65.147,30.017 R15.2
NetIC4_3: IC4.3 R19.1 | length 2.4
  Top Layer w0.254: IC4.3 66.417,30.017 R19.1
NetIC4_4: IC4.4 R20.2 | length 2.5
  Top Layer w0.254: IC4.4 67.687,30.779 68.068,30.398 R20.2
NetIC4_6: IC4.6 R21.2 R22.2 R23.2 | length 18.5
  Top Layer w0.254: R23.2 R22.2 R21.2 66.544,26.588 66.829,26.873 68.339,26.873 68.607,27.142 68.607,27.145 69.195,27.733 69.195,34.324 68.322,35.197 68.322,36.113 67.897,36.539 67.053,36.539 66.64,36.951 66.64,37.459 IC4.6
NetIC4_7: IC4.7 L2.1 | length 1.9
  Top Layer w0.635: IC4.7 65.147,39.415 65.274,39.542
NetQ3_1: Q3.1 R8.1 R9.2 | length 3.4
  Top Layer w0.254: Q3.1 61.804,31.278 R8.1 R9.2
NetQ3_3: Q3.3 R10.2 | length 3
  Top Layer w0.254: R10.2 57.13,30.414 58.146,31.43 Q3.3
NetQ4_1: Q4.1 R11.1 | length 2.1
  Top Layer w0.254: R11.1 56.922,28.89 57.618,29.586 Q4.1
NetQ4_3: Q4.3 R9.1 | length 1.8
  Top Layer w0.254: Q4.3 61.926,28.636 R9.1
NetQ5_1: Q5.1 R24.2 | length 4.3
  Top Layer w0.254: Q5.1 67.986,21.066 67.713,21.339 67.713,21.389 67.077,22.025 67.077,23.54 67.72,24.184 67.72,24.228 68.018,24.526 R24.2
NetQ5_3: Q5.3 R22.1 | length 2.9
  Top Layer w0.254: R22.1 65.02,23.633 66.036,22.617 Q5.3
NetQ6_1: Q6.1 R25.2 | length 1.8
  Top Layer w0.254: R25.2 61.972,24.048 62.512,23.508 Q6.1
NetQ6_3: Q6.3 R23.1 | length 2.9
  Top Layer w0.254: R23.1 63.496,23.818 64.512,22.802 Q6.3
V_BAT: C13.2 IC2.2 L2.2 Q3.2 R8.2 R15.1 R17.2 | length 42.7
  Top Layer w0.254: Q3.2 60.978,33.106 61.354,32.73 R8.2 61.972,32.746 v1(61.972,33.827) ; v1(65.274,27.604) R15.1 ; 67.686,45.004 69.846,42.844 R17.2 69.988,40.812 70.608,40.812 70.862,40.558 70.862,34.97 69.846,33.954 69.846,27.471 69.338,26.963 v1(69.338,26.842)
  Top Layer w0.635: IC2.2 C13.2@66.274,48.194 ; L2.2@66.223,46.096 66.29,46.164 C13.2
  Bottom Layer w0.254: v1(61.972,33.827) 61.972,28.319 63.45,26.842 64.512,26.842 v1(65.274,27.604) 66.036,26.842 v1(69.338,26.842)
V_USB: D1.1 H1.1 H1.2 IC2.1 R1.2 | length 33.4
  Top Layer w0.254: R1.2 58.192,47.548 59.486,48.841 59.486,48.966 D1.1 ; 61.427,48.209 61.464,48.246 v1(61.464,49.121) ; IC2.1 IC2.1@62.423,48.198 ; v1(62.444,49.115) 62.438,49.11 62.438,48.224 62.419,48.205 62.423,48.2 IC2.1@62.423,48.198 ; v1(63.446,49.121) 62.774,48.45 62.675,48.45 IC2.1@62.423,48.198
  Top Layer w0.635: D1.1@59.486,48.966 60.243,48.209 61.427,48.209 IC2.1@62.405,48.209 ; IC2.1@62.423,48.2 IC2.1@62.432,48.208
  Bottom Layer w0.254: v1(62.444,49.115) 62.444,49.284 v1@62.48,49.321
  Bottom Layer w1.016: 57.019,69.768 57.019,54.274 59.081,52.212 61.123,52.212 61.718,51.617 61.718,50.083 v1@62.48,49.321
pads on no net: IC3.6

## Polygon pours and split planes (outlines as drawn)
+5V on Top Layer "NONET_L01_P-001" (solid, remove dead copper, pour order 10): 67.546,66.578 68.449,67.482 68.449,72.943 67.941,73.451 63.75,73.451 63.369,73.07 63.369,70.944 64.825,69.488 64.825,68.684 64.258,68.117 64.258,66.842
GND on Top Layer "GND_L01_P006" (solid, remove dead copper, pour order 6): 59.686,62.783 60.775,61.889 63.862,61.889 63.862,59.08 59.798,59.08 57.852,61.026 57.852,62.193 59.189,63.191
+V_SYS on Top Layer "+V_SYS_L01_P001" (solid, remove dead copper, pour order 1): 57.846,59.08 57.846,57.812 59.149,56.945 60.761,55.127 63.719,55.127 64.37,55.778 64.37,58.064 63.862,58.572 59.29,58.572 58.782,59.08
+5V on Top Layer "+5V_L01_P002" (solid, remove dead copper, pour order 2): 60.56,67.462 58.528,65.43 58.528,63.398 63.862,63.398 64.116,63.652 64.116,65.176 65.132,66.192 67.164,66.192 67.672,66.7 67.672,67.462 67.164,67.97 60.814,67.97 60.56,67.716
NetD2_1 on Top Layer "NETD2_1_L01_P003" (solid, remove dead copper, pour order 3): 65.904,64.424 65.904,62.275 67.936,62.275 67.936,64.678
+V_SYS on Top Layer "NONET_L01_P-001" (solid, remove dead copper, pour order 0): 66.798,49.51 67.143,49.166 68.929,49.166 70.608,50.845 70.608,55.798 63.744,55.798 63.744,52.679 64.561,51.861 66.036,51.861 66.798,51.099
NetC3_2 on Top Layer "NONET_L01_P-001" (solid, remove dead copper, pour order 7): 62.294,51.349 60.567,54.509 57.146,50.841 57.09,49.726 57.734,49.738 57.83,49.919 57.838,50.841 60.754,50.841 61.213,50.841 61.213,49.825 66.293,49.825 66.293,51.095 66.039,51.349
GND on Bottom Layer "NONET_L01_P-001" (solid, remove dead copper, pour order 11): 52.574,73.451 52.574,20.365 54.606,20.365 54.606,47.67 57.527,50.591 57.527,51.607 55.114,54.02 55.114,69.006 53.209,70.911 53.209,73.451
GND on Bottom Layer "NONET_L01_P-001" (solid, remove dead copper, pour order 9): 57.781,56.306 60.575,53.512 63.242,53.512 64.214,52.54 64.214,50.718 71.243,50.718 71.624,51.099 71.624,73.451 58.289,73.451 58.289,70.608 57.781,70.1 57.781,57.068
V_USB on Bottom Layer "NONET_L01_P-001" (solid, remove dead copper, pour order 4): 53.209,73.451 58.289,73.451 58.289,70.911 57.527,70.149 57.527,56.052 60.321,53.258 63.115,53.258 64.004,52.369 63.623,51.988 62.861,51.988 62.48,51.607 57.893,51.607 55.114,54.386 55.114,68.879 53.209,70.784 53.209,71.038
V_USB on Bottom Layer "NONET_L01_P-001" (solid, remove dead copper, pour order 5): 60.956,52.369 60.956,48.559 64.004,48.559 64.004,52.369
GND on Bottom Layer "NONET_L01_P-001" (solid, remove dead copper, pour order 8): 54.352,51.353 71.624,51.353 71.624,20.365 54.352,20.365

## Silkscreen, mask and mechanical layers (free items; w line width, h text height)
Top Overlay:
  circle w0.152: c57.654,23.286 r3.014
  lines w0.127: 57.632,55.153 61.232,55.153 ; 62.656,27.986 61.337,26.715 59.813,26.715 55.241,26.715 55.241,35.732 57.146,35.732 58.797,34.208 61.337,34.208 62.656,33.35
OUTLINE:
  lines w0.127: 52,20 72,20 72,74 52,74 52,73.5 52,20